# Altium PCB BLE_THERMISTOR.PcbDoc
Units mm, origin at the board's own origin, x right, y up, seen from the top; angles counter-clockwise.
Board outline 50 x 50 mm, 2 copper layers (Top Layer, Bottom Layer); 26 components, 19 nets, 120 pads, 49 vias.
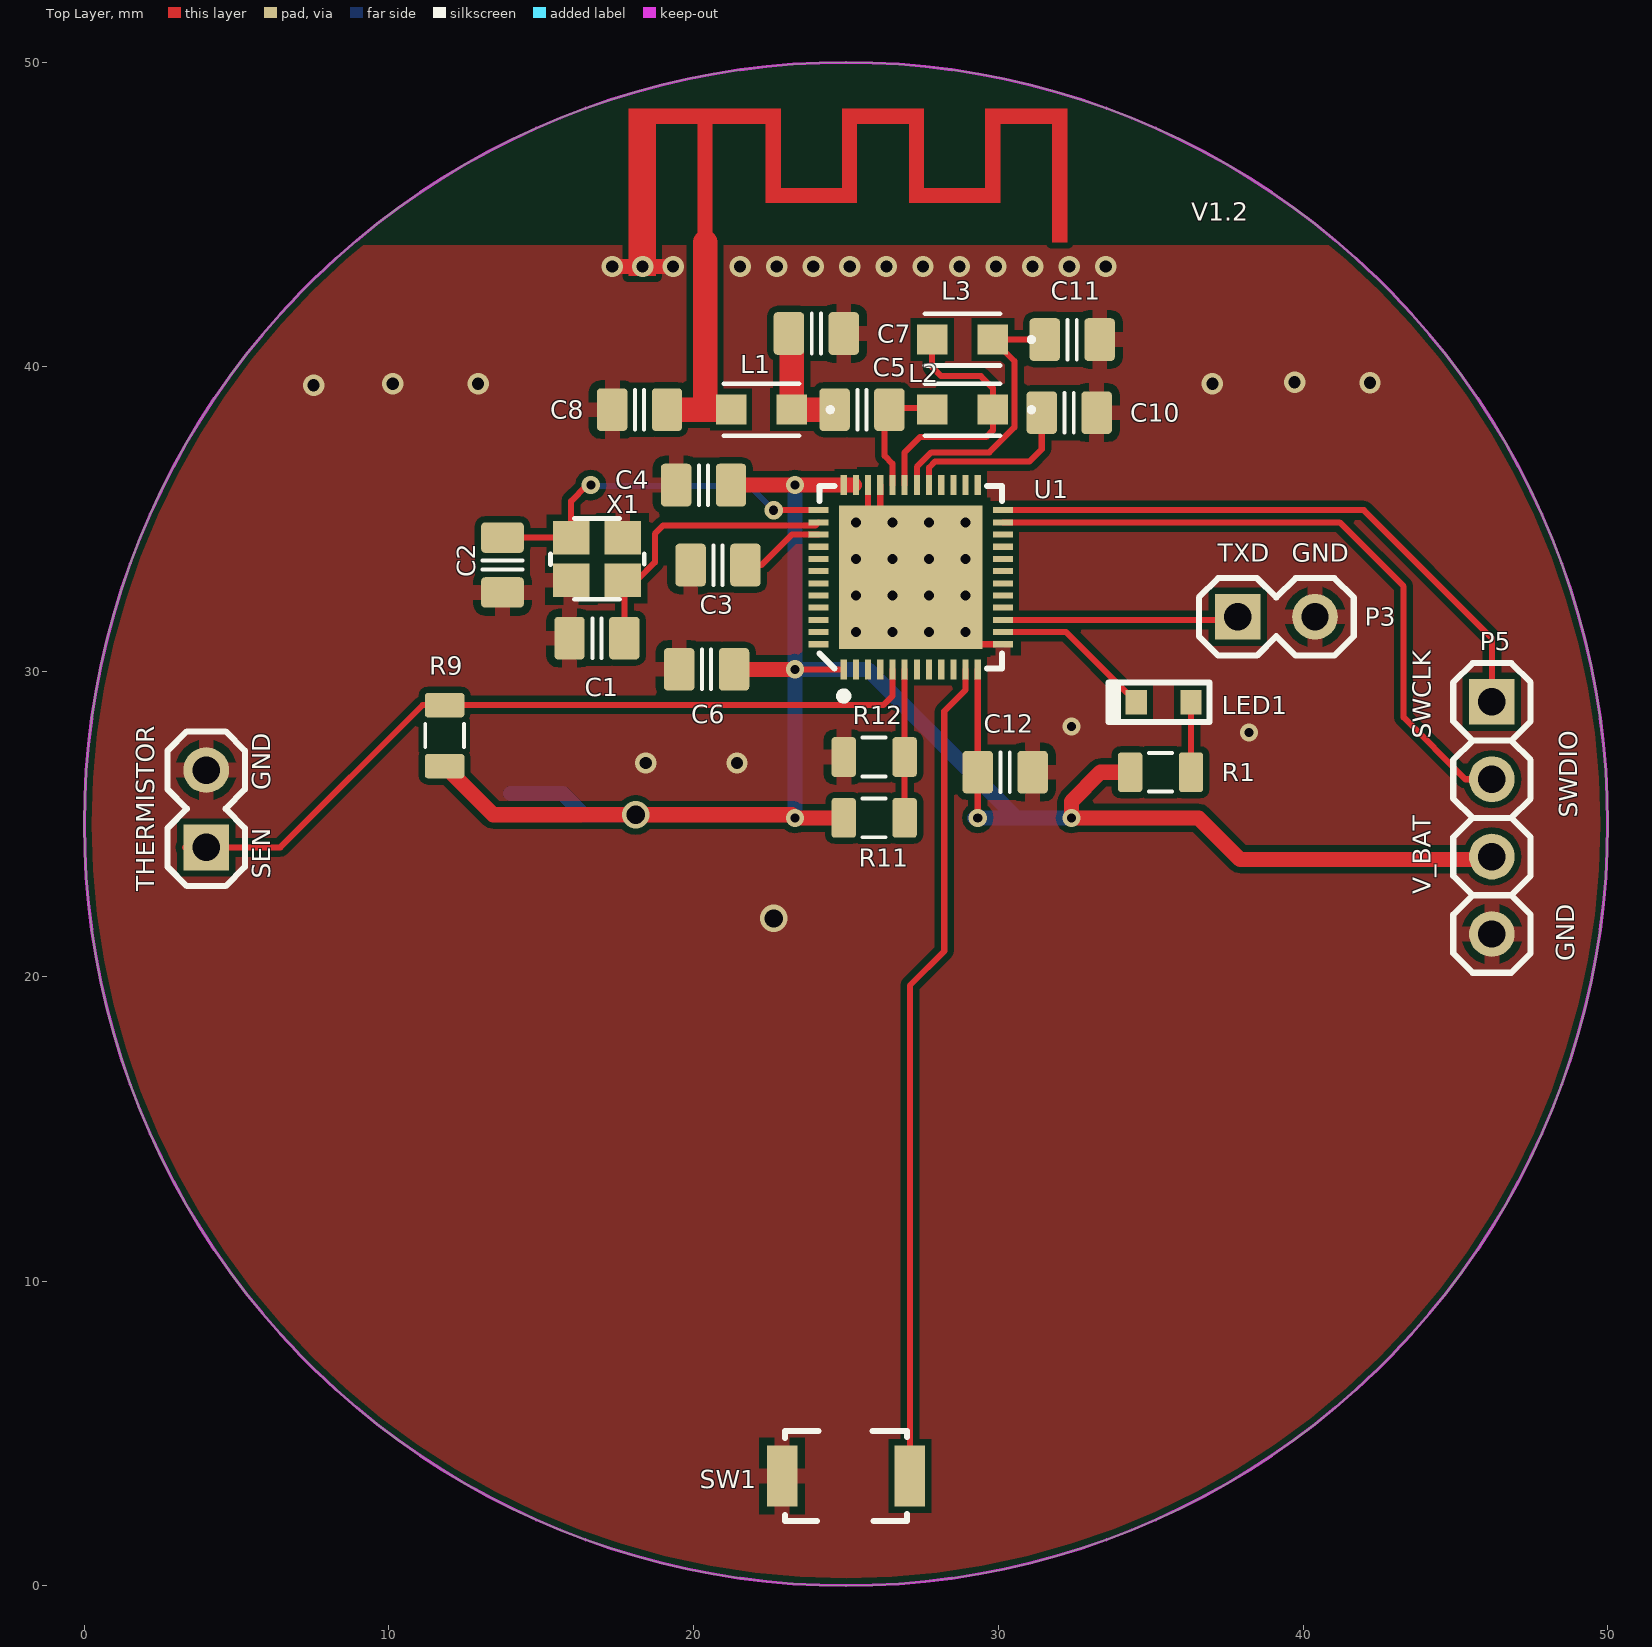
[diagram p0: Top Layer view]
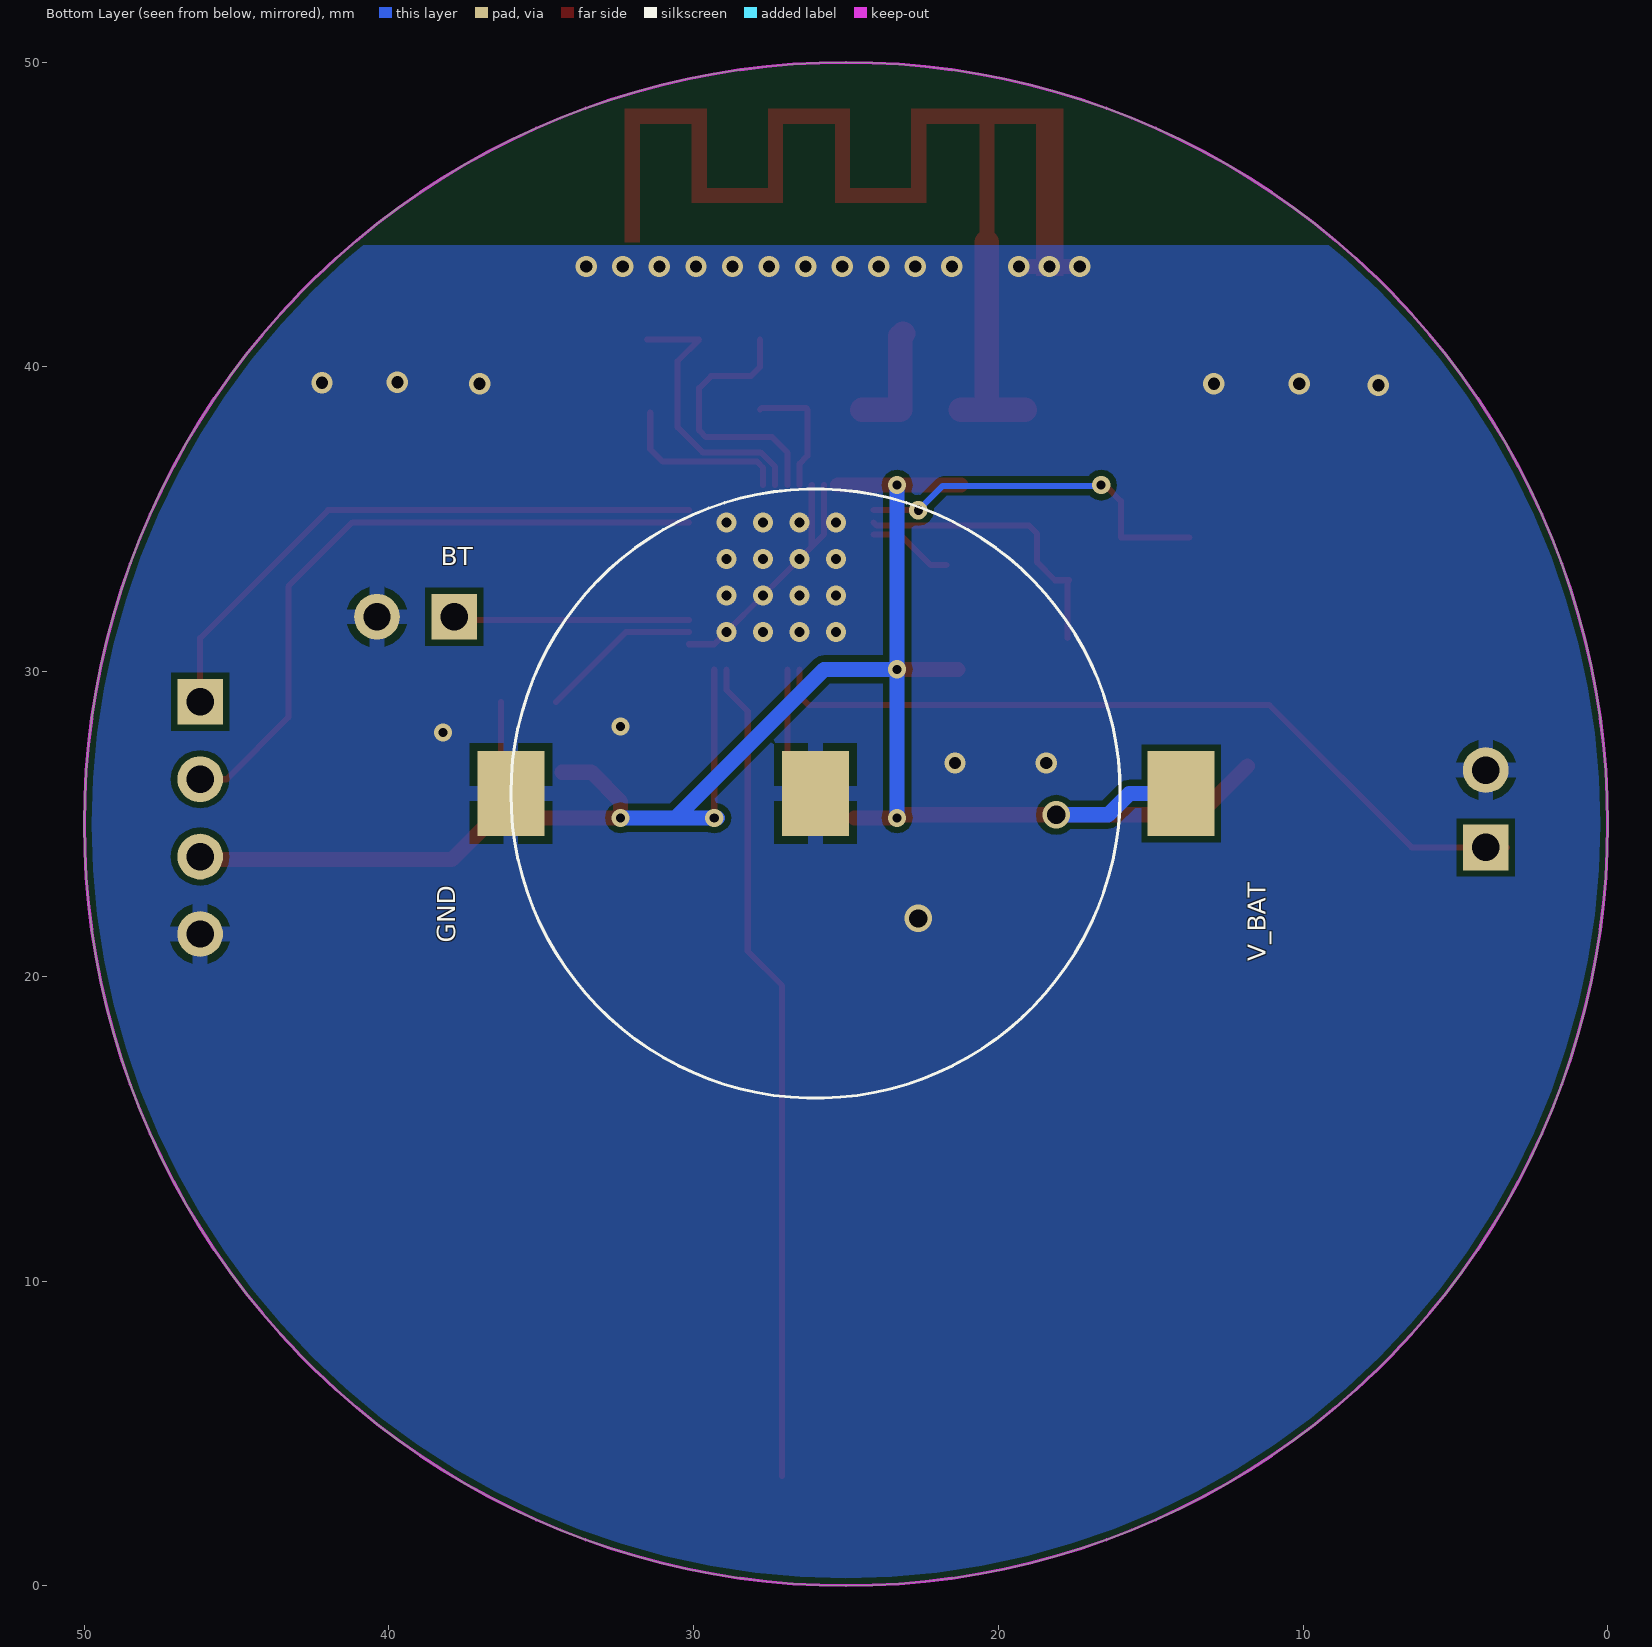
[diagram p1: Bottom Layer view, seen from below]
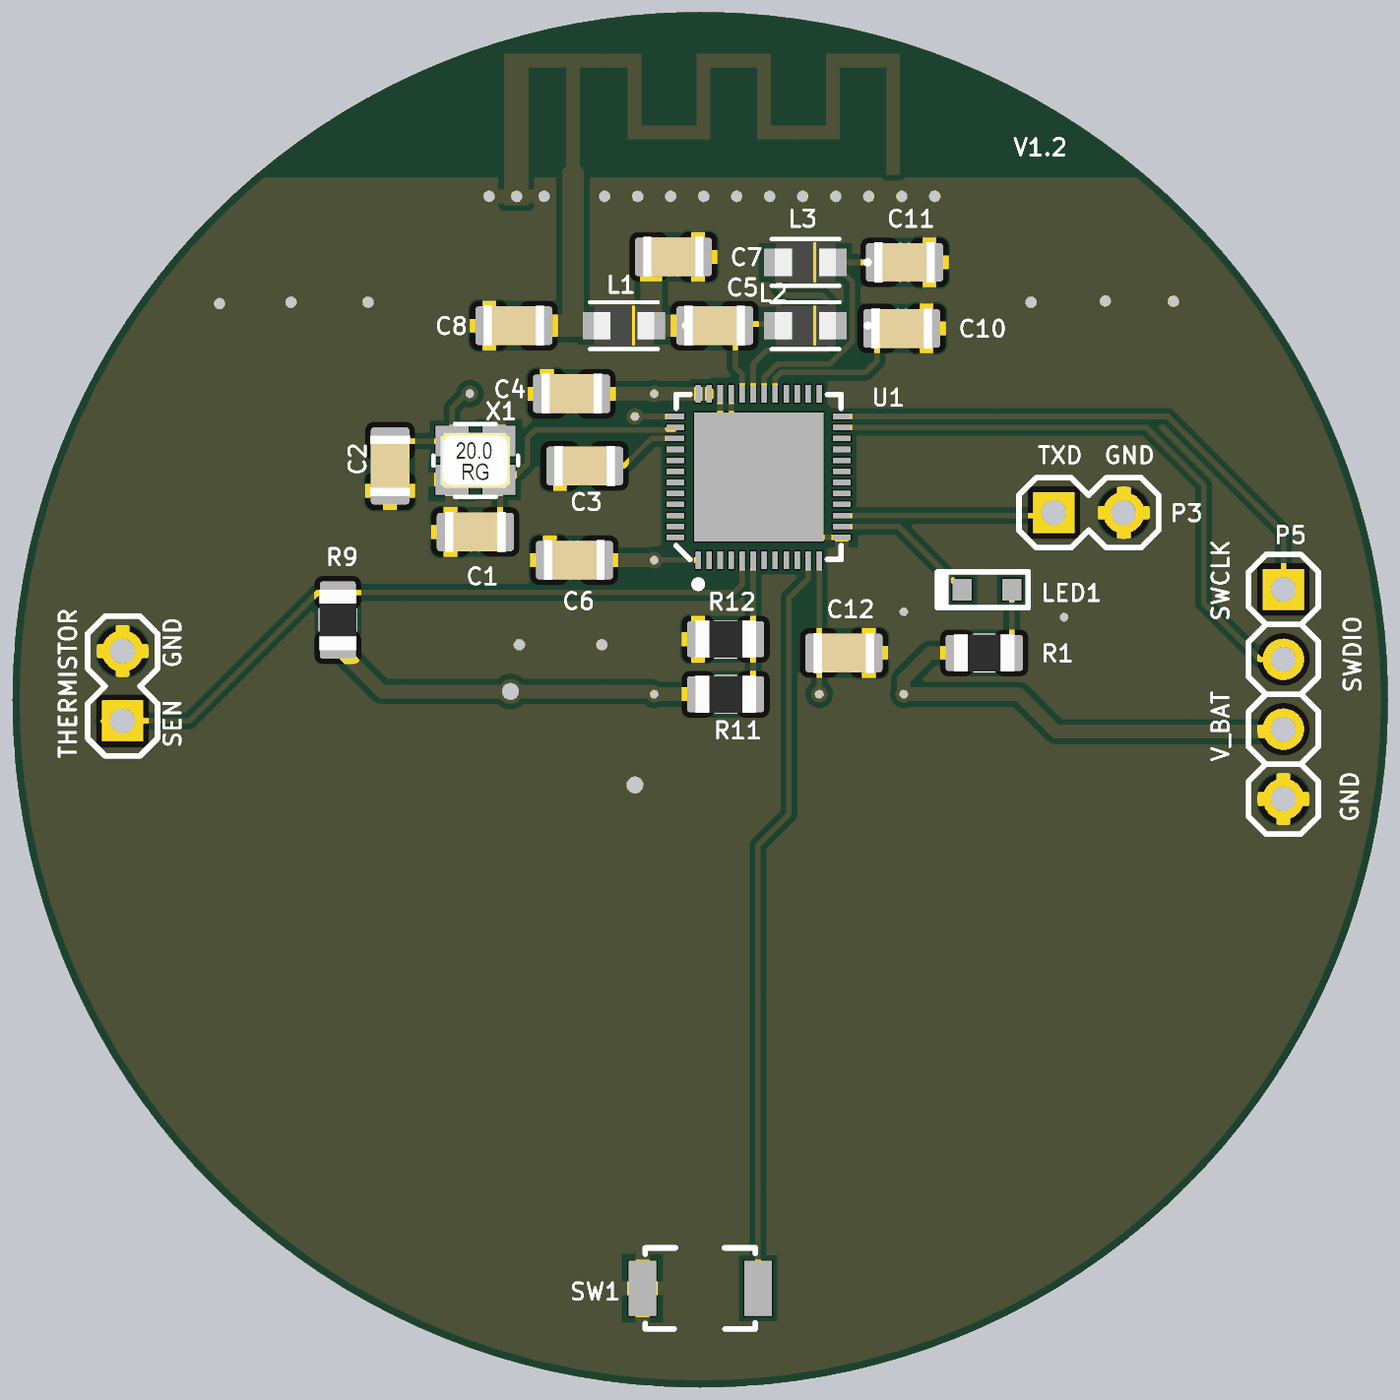
[diagram p2: 3D render of the assembled board from above, using the file's embedded part models]

## Layer stack, top to bottom
Top Solder: solder mask 0.0102, Solder Resist, Dk 3.5
Top Layer: signal copper 0.0356
Dielectric1: dielectric 0.3196, FR-4, Dk 4.8
Bottom Layer: signal copper 0.0356
Bottom Solder: solder mask 0.0102, Solder Resist, Dk 3.5

## Board outline
25,0 cw(c25,25) 0,25 cw(c25,25) 25,50 cw(c25,25) 50,25 cw(c25,25)

## Design rules (kind name [scope] priority, off if disabled: settings)
Clearance Clearance_Poly [InPoly] p1: gap=0.2 ignorepadtopadclearanceinfootprint=FALSE except(0: Arc-Hole Track-Hole SMDPad-Hole THPad-Hole Via-Hole Fill-Hole Poly-Hole Region-Hole Text-Hole)
Clearance [All] p2: gap=0.1 ignorepadtopadclearanceinfootprint=FALSE except(0: Arc-Hole Track-Hole SMDPad-Hole THPad-Hole Via-Hole Fill-Hole Poly-Hole Region-Hole Text-Hole)
ComponentClearance [All] p1 off: gap=0.2 collisioncheckmode=3 verticalgap=0.1 showdistances=FALSE
HoleSize [All] p1: absolutevalues=TRUE maxlimit=4 minlimit=0.2 maxpercent=80.000 minpercent=20.000
HoleToHoleClearance [All] p1: gap=0.1 allowstackedmicrovias=TRUE
MinimumSolderMaskSliver [All] p1: minsoldermaskwidth=0.05
PlaneConnect [All] p1: planeconnectstyle=Relief reliefexpansion=0.2 reliefentries=4 reliefconductorwidth=0.2 reliefairgap=0.2
PolygonConnect PolygonConnect_via [IsVia] p1: connectstyle=Direct reliefconductorwidth=0.254 reliefentries=4 polygonreliefangle="90 Angle" airgapwidth=0.254
PolygonConnect [All] p2: connectstyle=Relief reliefconductorwidth=0.5 reliefentries=4 polygonreliefangle="90 Angle" airgapwidth=0.254
RoutingVias [All] p1: holewidth=0.4 width=0.7 viastyle="Through Hole" minholewidth=0.2 minwidth=0.5 maxholewidth=1 maxwidth=1.2
SilkToSilkClearance [All] p1 off: silktosilkclearance=0.1
SilkToSolderMaskClearance SilkscreenOverComponentPads [IsPad] p1 off: minsilkscreentomaskgap=0.1 clearancetoexposedcopper=TRUE
SolderMaskExpansion [All] p1: expansion=0.2 useseparateexpansions=TRUE expansionbottom=0.1
Width general [All] p1: maxlimit=2 minlimit=0.1 preferedwidth=0.2
Width [All] p2: maxlimit=2 minlimit=0.1 preferedwidth=0.2
23 further rules are at their usual default settings.

## Components (designator, comment, footprint, x,y, rotation, side; value= is the part's Value field where it differs from the comment)
BT "CR2016" BLP2016SM-GTR 25,26 r0 bottom locked
C1 "GJM1555C1H120GB01D" CAPC2012X135N 16.825,31.1 r0 top value=12pF
C2 "GJM1555C1H120GB01D" CAPC2012X135N 13.725,33.5 r90 top value=12pF
C3 "GRM152C80J104ME19D" CAPC2012X135N 20.8,33.5 r180 top value=0.1uF
C4 "GCM155R71H102KA37D" CAPC2012X135N 20.325,36.125 r180 top value=1nF
C5 "GJM1555C1H2R2BB01D" CAPC2012X135N 25.525,38.6 r180 top value=2.2pF
C6 "GRM152C80J104ME19D" CAPC2012X135N 20.425,30.075 r180 top value=0.1uF
C7 "GRM1555C1H1R0WA01D" CAPC2012X135N 24.025,41.1 r0 top value=1pF
C8 "GJM1555C1H1R5CB01D" CAPC2012X135N 18.225,38.6 r180 top value=1.5pF
C10 "GCM155R71C473KA37D" CAPC2012X135N 32.325,38.5 r0 top value=47nF
C11 "GRM155R71E222KA01D" CAPC2012X135N 32.425,40.9 r0 top value=2.2nF
C12 "GRM152C80J104ME19D" CAPC2012X135N 30.225,26.7 r180 top value=0.1uF
L1 "L-07C3N3SV6T" IND0805 22.225,38.6 r180 top value=3.3nH
L2 "L-07C4N7SV6T" IND0805 28.825,38.6 r180 top value=4.7nH
L3 "L-07C10NJV6T" IND0805 28.825,40.9 r180 top value=10nH
LED1 "LTST-C191KSKT" LED 35.425,29 r180 top
P3 "M20-9990246" HDR1X2 39.125,31.8 r0 top
P5 "M20-9990446" HDR1X4 46.2,25.2 r270 top
R1 "CRCW040210K0FKEDC" RESC2012X70N 35.325,26.7 r180 top value=2K
R9 "CRCW040210K0FKEDC" RESC2012X70N 11.825,27.9 r270 top value=10K
R11 "CRCW04021M00FKED" RESC2012X70N 25.925,25.2 r180 top value=1M
R12 "CRCW04021M00FKED" RESC2012X70N 25.925,27.2 r0 top value=1M
SW1 "LY-A03-05A" LY-A03-05A 25,3.6 r0 top
THERMISTOR "M20-9990246" HDR1X2 4,25.5 r90 top
U1 "NRF51822-QFAA-T" QFN40P600X600X90-48N 27.125,33.1 r90 top locked
X1 "NX2520SA-16MHZ-STD-CSW-5" BT-XTAL_2520 16.825,33.7 r180 top value=16MHz

## Footprints (in the part's own frame and the unit in brackets; to place one, negate y for a bottom-side part, rotate by r counter-clockwise, add the part's x,y. Pads: shape width x height; smd on the part's side, far side on the other; paste and mask are expansions set on the pad)
BLP2016SM-GTR [mm]
  rect 2.2x2.8 smd mask+0.05: 1(-11,0) 2(1,0) 2(11,0)
  silkscreen extent -9,-10 11,10
BT-XTAL_2520 [mm]
  rect 1.2x1.1 smd paste+0 mask+0.05: 1(-0.85,0.7) 2(0.85,0.7) 3(0.85,-0.7) 4(-0.85,-0.7)
  silkscreen extent -1.55,-1.33 1.53,1.32, body extent -1.25,-1 1.27,1, height 0.56
CAPC2012X135N [mm] "Chip Capacitor, Body 2.0x1.2mm, EIA 0805, IPC Medium Density"
  round 0.254 on Mech15: 0(0,0)
  rrect25% 1x1.4 smd: 1(-0.9,0) 2(0.9,0)
  Top Layer pour cut-out: -0.675,0.7 -0.475,0.9 0.475,0.9 0.675,0.7 0.675,-0.7 0.475,-0.9 -0.475,-0.9 -0.675,-0.7
  silkscreen extent -0.15,-0.65 0.15,0.65, body extent -1.1,-0.72 1.1,0.73, height 1.34
HDR1X2 [mm] "1X13"
  rect 1.5x1.5 hole 0.9: 1(-1.27,0)
  round 1.5 hole 0.9: 2(1.27,0)
  silkscreen extent -2.54,-1.27 2.54,1.27, body extent -2.54,-1.27 2.54,1.27, height 8.6
HDR1X4 [mm] "1X13"
  rect 1.5x1.5 hole 0.9: 1(-3.81,0)
  round 1.5 hole 0.9: 2(-1.27,0) 3(1.27,0) 4(3.81,0)
  silkscreen extent -5.08,-1.27 5.08,1.27, body extent -5.08,-1.27 5.08,1.27, height 8.6
IND0805 [mil]
  rect 39.5x39 smd paste+0 mask+0: 1(-39.25,0) 2(39.25,0)
  silkscreen extent -92,-34 49,34, body extent -43,-29 44,29, height 33
LED [mm]
  rect 0.7x0.8 smd paste+0 mask+0.05: A(-0.9,0) K(0.9,0)
  round 0.2 on Mech4 paste-10 mask-10: ""(0,0)
  silkscreen extent -1.5,-0.65 1.8,0.65, body extent -0.8,-0.4 0.8,0.4, height 0.5
LY-A03-05A [mm]
  rect 1x2 smd paste+0 mask+0.05: 1(-2.1,0) 2(2.1,0)
  silkscreen extent -2,-1.48 2,1.48, body extent -1.83,-1.28 1.78,1.28, height 2
QFN40P600X600X90-48N [mm]
  rect 0.65x0.2 smd paste+0 mask+0.05: 1(-3.025,2.2) 2(-3.025,1.8) 3(-3.025,1.4) 4(-3.025,1) 5(-3.025,0.6) 6(-3.025,0.2) 7(-3.025,-0.2) 8(-3.025,-0.6) 9(-3.025,-1) 10(-3.025,-1.4) 11(-3.025,-1.8) 12(-3.025,-2.2) 25(3.025,-2.2) 26(3.025,-1.8) 27(3.025,-1.4) 28(3.025,-1) 29(3.025,-0.6) 30(3.025,-0.2) 31(3.025,0.2) 32(3.025,0.6) 33(3.025,1) 34(3.025,1.4) 35(3.025,1.8) 36(3.025,2.2)
  rect 0.2x0.65 smd paste+0 mask+0.05: 13(-2.2,-3.025) 14(-1.8,-3.025) 15(-1.4,-3.025) 16(-1,-3.025) 17(-0.6,-3.025) 18(-0.2,-3.025) 19(0.2,-3.025) 20(0.6,-3.025) 21(1,-3.025) 22(1.4,-3.025) 23(1.8,-3.025) 24(2.2,-3.025) 37(2.2,3.025) 38(1.8,3.025) 39(1.4,3.025) 40(1,3.025) 41(0.6,3.025) 42(0.2,3.025) 43(-0.2,3.025) 44(-0.6,3.025) 45(-1,3.025) 46(-1.4,3.025) 47(-1.8,3.025) 48(-2.2,3.025)
  rect 4.7x4.7 smd mask+0.05: 49(0,0)
  silkscreen extent -4.02,-3 3,3, body extent -3,-3 3,3, height 0.9
RESC2012X70N [mm] "Chip Resistor, Body 2.0x1.2mm, EIA 0805, IPC Medium Density"
  round 0.254 on Mech15: 0(0,0)
  rrect25% 0.8x1.3 smd: 1(-1,0) 2(1,0)
  Top Layer pour cut-out: -0.725,0.65 -0.525,0.85 0.525,0.85 0.725,0.65 0.725,-0.65 0.525,-0.85 -0.525,-0.85 -0.725,-0.65
  silkscreen extent -0.38,-0.64 0.38,0.64, body extent -1.1,-0.67 1.1,0.68, height 0.69

## Part data
BT: library part Battery, "BATTERY LITHIUM 3V COIN 20MM", BT case Description="2016 COIN CELL HOLDER SMT", BT case ManufactureNum=BLP2016SM-GTR
C1 C2: library part C0402-12p, "CAP CER 12PF 50V C0G/NP0 0402"
C3 C6 C12: library part C0402-100n, "CAP CER 0.1UF 6.3V X6S 0402"
C4: library part C0402-1n0, "CAP CER 1000PF 50V X7R 0402"
C5: library part C0402-2.2p, "CAP CER 2.2PF 50V C0G/NP0 0402"
C7: library part C0402-1.0p, "CAP CER 1PF 50V C0G/NP0 0402"
C8: library part C0402-1.5p, "CAP CER 1.5PF 50V C0G/NP0 0402"
C10: library part C0402-47n, "CAP CER 0.047UF 16V X7R 0402"
C11: library part C0402-2n2, "CAP CER 2200PF 25V X7R 0402"
L1: library part L0402-3n3, "FIXED IND 3.3NH 300MA 190 MOHM"
L2: library part L0402-4n7, "FIXED IND 4.7NH 300MA 240 MOHM"
L3: library part L0402-10n, "FIXED IND 10NH 250MA 450 MOHM"
LED1: library part T8C02AR-0, "LED YELLOW CLEAR 0603 SMD"
P3 THERMISTOR: library part "Header 2", "SIL VERTICAL PC TAIL PIN HEADER", URL=https://www.digikey.com/products/en?keywords=952-2262-ND
P5: library part "Header 4", "SIL VERTICAL PC TAIL PIN HEADER", URL=https://www.digikey.com/products/en?keywords=952-2266-ND
R1: library part Resistor, "RES SMD 2K OHM 1% 1/16W 0805"
R9: library part Resistor, "RES SMD 10K OHM 1% 1/16W 0402"
R11 R12: library part Resistor, "RES SMD 1M OHM 1% 1/16W 0402"
SW1: library part PB_button, "SWITCH TACTILE SPST-NO 0.05A 12V", URL=https://detail.1688.com/offer/1283898666.html?spm=a261b.2187593.1998088710.733.R9t4Et
U1: "IC RF TXRX+MCU BLUETOOTH 48VFQFN"
X1: "CRYSTAL 16.0000MHZ 8PF SMD"

## Via types
v1: diameter 0.7, hole 0.4, Top Layer to Bottom Layer, 22 vias
v2: diameter 0.66, hole 0.33, Top Layer to Bottom Layer, 16 vias
v3: diameter 0.6, hole 0.3, Top Layer to Bottom Layer, 9 vias
v4: diameter 0.9, hole 0.6, Top Layer to Bottom Layer, 2 vias

## Nets (pads, with @x,y where several pads share a name; then routed paths per layer and width w, separated by ;. In a path a pad name is that pad's centre, name@x,y a point inside that pad or via, vN(x,y) a via of type N, cw(c..) or ccw(c..) an arc to the next point about the centre after c; other vN are vias at no path point)
BUTTON: SW1.2 U1.11 | length 27.2
  Top Layer w0.2: SW1.2 27.1,19.7 28.225,20.825 28.225,28.7 28.925,29.4 U1.11
GND: BT.2 C1.1 C2.1 C3.2 C4.2 C6.2 C7.2 C8.2 C10.2 C11.2 C12.1 P3.2 P5.4 R12.1 SW1.1 THERMISTOR.2 U1.13 U1.33 U1.34 U1.49 X1.2 X1.4 | length 11.6
  Top Layer w0.2: U1.34 25.725,34.5 U1.49@26.125,34.1 ; U1.33 U1.49@26.125,34.1 ; U1.13 29.325,30.9 v2(28.925,31.3) v2(27.725,32.5) U1.49 v2(26.525,33.7) U1.49@26.125,34.1
  Top Layer w0.5: v1(17.325,43.3) v1(18.325,43.3) v1(19.325,43.3)
  other v1: 18.425,27 21.425,27 7.525,39.4 10.125,39.451 12.925,39.451 37.025,39.451 39.725,39.5 42.2,39.484 21.525,43.3 22.725,43.3 23.925,43.3 25.125,43.3 26.325,43.3 27.525,43.3 28.725,43.3 29.925,43.3 31.125,43.3 32.325,43.3 33.525,43.3
  other v2: 25.325,31.3 26.525,31.3 27.725,31.3 25.325,32.5 26.525,32.5 28.925,32.5 25.325,33.7 27.725,33.7 28.925,33.7 25.325,34.9 26.525,34.9 27.725,34.9 28.925,34.9
  other v3: 38.225,28 32.4,28.2
  other v4: 22.625,21.9
LED: LED1.K U1.14 | length 5.3
  Top Layer w0.2: U1.14 32.225,31.3 LED1.K
NetC1_2: C1.2 U1.38 X1.1 | length 9.7
  Top Layer w0.2: C1.2 17.725,32.95 X1.1 18.14,33 18.725,33.585 18.725,34.525 19,34.8 24,34.8 U1.38
NetC2_2: C2.2 U1.37 X1.3 | length 12.1
  Top Layer w0.2: C2.2 X1.3 15.975,35.6 16.475,36.1 v3@16.625,36.1 ; v3(22.625,35.3) U1.37
  Bottom Layer w0.2: v3@16.625,36.1 21.825,36.1 v3(22.625,35.3)
  other v3: 16.625,36.125
NetC3_1: C3.1 U1.39 | length 2.8
  Top Layer w0.2: C3.1 22.225,33.5 23.225,34.5 U1.39
NetC5_1: C5.1 L2.2 U1.32 | length 4.2
  Top Layer w0.2: C5.1@26.29,38.66 C5.1@26.325,38.66 ; U1.32 26.525,36.825 26.265,37.085 26.265,38.6 C5.1@26.325,38.66 ; L2.2 27.768,38.66 C5.1@26.325,38.66
NetC5_2: C5.2 C7.1 L1.1 | length 3.8
  Top Layer w0.8: C7.1 23.222,41.003 L1.1 C5.2@24.465,38.6
NetC8_1: C8.1 L1.2 | length 7.6
  Top Layer w0.8: C8.1 20.375,38.6 ; 20.375,44.1 20.375,38.6 ; L1.2 20.375,38.6
NetC10_1: C10.1 U1.29 | length 5.7
  Top Layer w0.2: U1.29 27.725,36.7 27.925,36.9 31.025,36.9 31.425,37.3 C10.1
NetC11_1: C11.1 L3.1 U1.30 | length 9.2
  Top Layer w0.2: U1.30 27.325,36.724 27.801,37.2 29.702,37.2 30.525,38.023 30.525,40.197 L3.1 C11.1
NetL2_1: L2.1 L3.2 U1.31 | length 8.8
  Top Layer w0.2: U1.31 26.925,37.2 27.425,37.7 29.602,37.7 29.822,37.92 L2.1 29.822,39.303 29.425,39.7 28.125,39.7 27.828,39.997 L3.2
NetLED1_A: LED1.A R1.1 | length 2.3
  Top Layer w0.2: R1.1 LED1.A
SWCLK: P5.1 U1.24 | length 19.9
  Top Layer w0.2: U1.24 42,35.3 46.2,31.1 P5.1
SWDIO: P5.2 U1.23 | length 22
  Top Layer w0.2: U1.23 41.2,34.9 43.3,32.8 43.3,28.5 45.33,26.47 P5.2@46.175,26.47
TEMP_SEN: R9.1 THERMISTOR.1 U1.5 | length 26.2
  Top Layer w0.2: THERMISTOR.1@3.3,24.23 6.43,24.23 11.1,28.9 R9.1 26.225,28.9 26.525,29.2 U1.5
TXD: P3.1 U1.15 | length 7.7
  Top Layer w0.2: U1.15 P3.1@37.855,31.7
V_BAT: BT.1 C4.1 C6.1 C12.2 P5.3 R1.2 R9.2 R11.2 U1.1 U1.12 U1.35 U1.36 | length 71.7
  Top Layer w0.2: v3(23.325,30.075) U1.1 ; v3(29.325,25.2) C12.2 ; U1.12 C12.2@29.325,27.2 ; C12.2 C12.2@29.325,27.2 ; C12.2 C12.2@29.325,27.2
  Top Layer w0.5: R9.2 13.425,25.3 v4(18.1,25.3) 23.225,25.3 v3(23.325,25.2) R11.2@24.725,25.2 ; C4.1 v3(23.325,36.125) U1.35@25.275,36.125 ; C6.1 v3(23.325,30.075) ; R1.2 33.358,26.7 32.4,25.742 v3(32.4,25.2) 36.575,25.2 37.938,23.838 46.083,23.838 P5.3@46.175,23.93
  Bottom Layer w0.5: BT.1 15.7,26 16.4,25.3 v4(18.1,25.3) ; v3(23.325,25.2) v3(23.325,30.075) ; v3(23.325,36.125) v3(23.325,30.075) ; v3@29.225,25.2 v3(29.325,25.2) 30.6,25.2 ; v3(32.4,25.2) 30.6,25.2 ; v3(23.325,30.075) 25.725,30.075 30.6,25.2
VBAT_SEN: R11.1 R12.2 U1.6 | length 4.9
  Top Layer w0.2: R11.1 U1.6
pads on no net: C1.0 C2.0 C3.0 C4.0 C5.0 C6.0 C7.0 C8.0 C10.0 C11.0 C12.0 LED1. R1.0 R9.0 R11.0 R12.0 U1.2 U1.3 U1.4 U1.7 U1.8 U1.9 U1.10 U1.16 U1.17 U1.18 U1.19 U1.20 U1.21 U1.22 U1.25 U1.26 U1.27 U1.28 U1.40 U1.41 U1.42 U1.43 U1.44 U1.45 U1.46 U1.47 U1.48

## Polygon pours and split planes (outlines as drawn)
GND on Bottom Layer (solid, remove dead copper, pour order 1044): -0.1,0 -0.1,44 50.1,44 50.1,0
GND on Top Layer "GND" (solid, remove dead copper, pour order 1046): 0.1,44 50,44 50,0 0.1,0

## Keep-outs
Keep-Out Layer:
  circle w0.1: c25,25 r25

## Other copper
Top Layer:
  region net NetC8_1: 20.625,48.4 20.125,48.4 20.125,44 20.625,44
  region net NetC8_1: 22.365,47.98 22.365,48.48 17.865,48.48 17.865,47.98
  region net NetC8_1: 22.865,48.48 22.365,48.48 22.365,45.88 22.865,45.88
  region net NetC8_1: 24.865,45.38 24.865,45.88 22.365,45.88 22.365,45.38
  region net NetC8_1: 32.265,47.98 31.765,47.98 31.765,44.08 32.265,44.08
  region net NetC8_1: 32.265,47.98 32.265,48.48 29.565,48.48 29.565,47.98
  region net NetC8_1: 30.065,47.98 29.565,47.98 29.565,45.38 30.065,45.38
  region net NetC8_1: 29.565,45.38 29.565,45.88 27.065,45.88 27.065,45.38
  region net NetC8_1: 27.565,48.48 27.065,48.48 27.065,45.88 27.565,45.88
  region net NetC8_1: 27.065,47.98 27.065,48.48 24.865,48.48 24.865,47.98
  region net NetC8_1: 25.365,47.98 24.865,47.98 24.865,45.38 25.365,45.38
  region net NetC8_1: 18.765,47.98 17.865,47.98 17.865,42.98 18.765,42.98

## Silkscreen, mask and mechanical layers (free items; w line width, h text height)
Top Overlay:
  text "V1.2" at 36.325,44.8 h0.6
  text "TXD" at 37.2,33.6 h0.6
  text "GND" at 39.625,33.6 h0.6
  text "SWCLK" at 44.2,27.8 h0.6 r90
  text "GND" at 6.1,26.1 h0.6 r90
  text "SWDIO" at 49,25.2 h0.6 r90
  text "SEN" at 6.1,23.2 h0.6 r90
  text "V_BAT" at 44.2,22.7 h0.6 r90
  text "GND" at 48.9,20.5 h0.6 r90
Bottom Overlay:
  text "GND" at 37.825,21.1 h0.6 r270
  text "V_BAT" at 11.225,20.5 h0.6 r270

## Dimensions
0,25 to 50,25 on Mechanical 2